# Altium PCB PCB1.PcbDoc
Units mm, origin at the board's own origin, x right, y up, seen from the top; angles counter-clockwise.
Board outline 50 x 50 mm, 2 copper layers (Top Layer, Bottom Layer); 12 components, 11 nets, 39 pads, 0 vias.
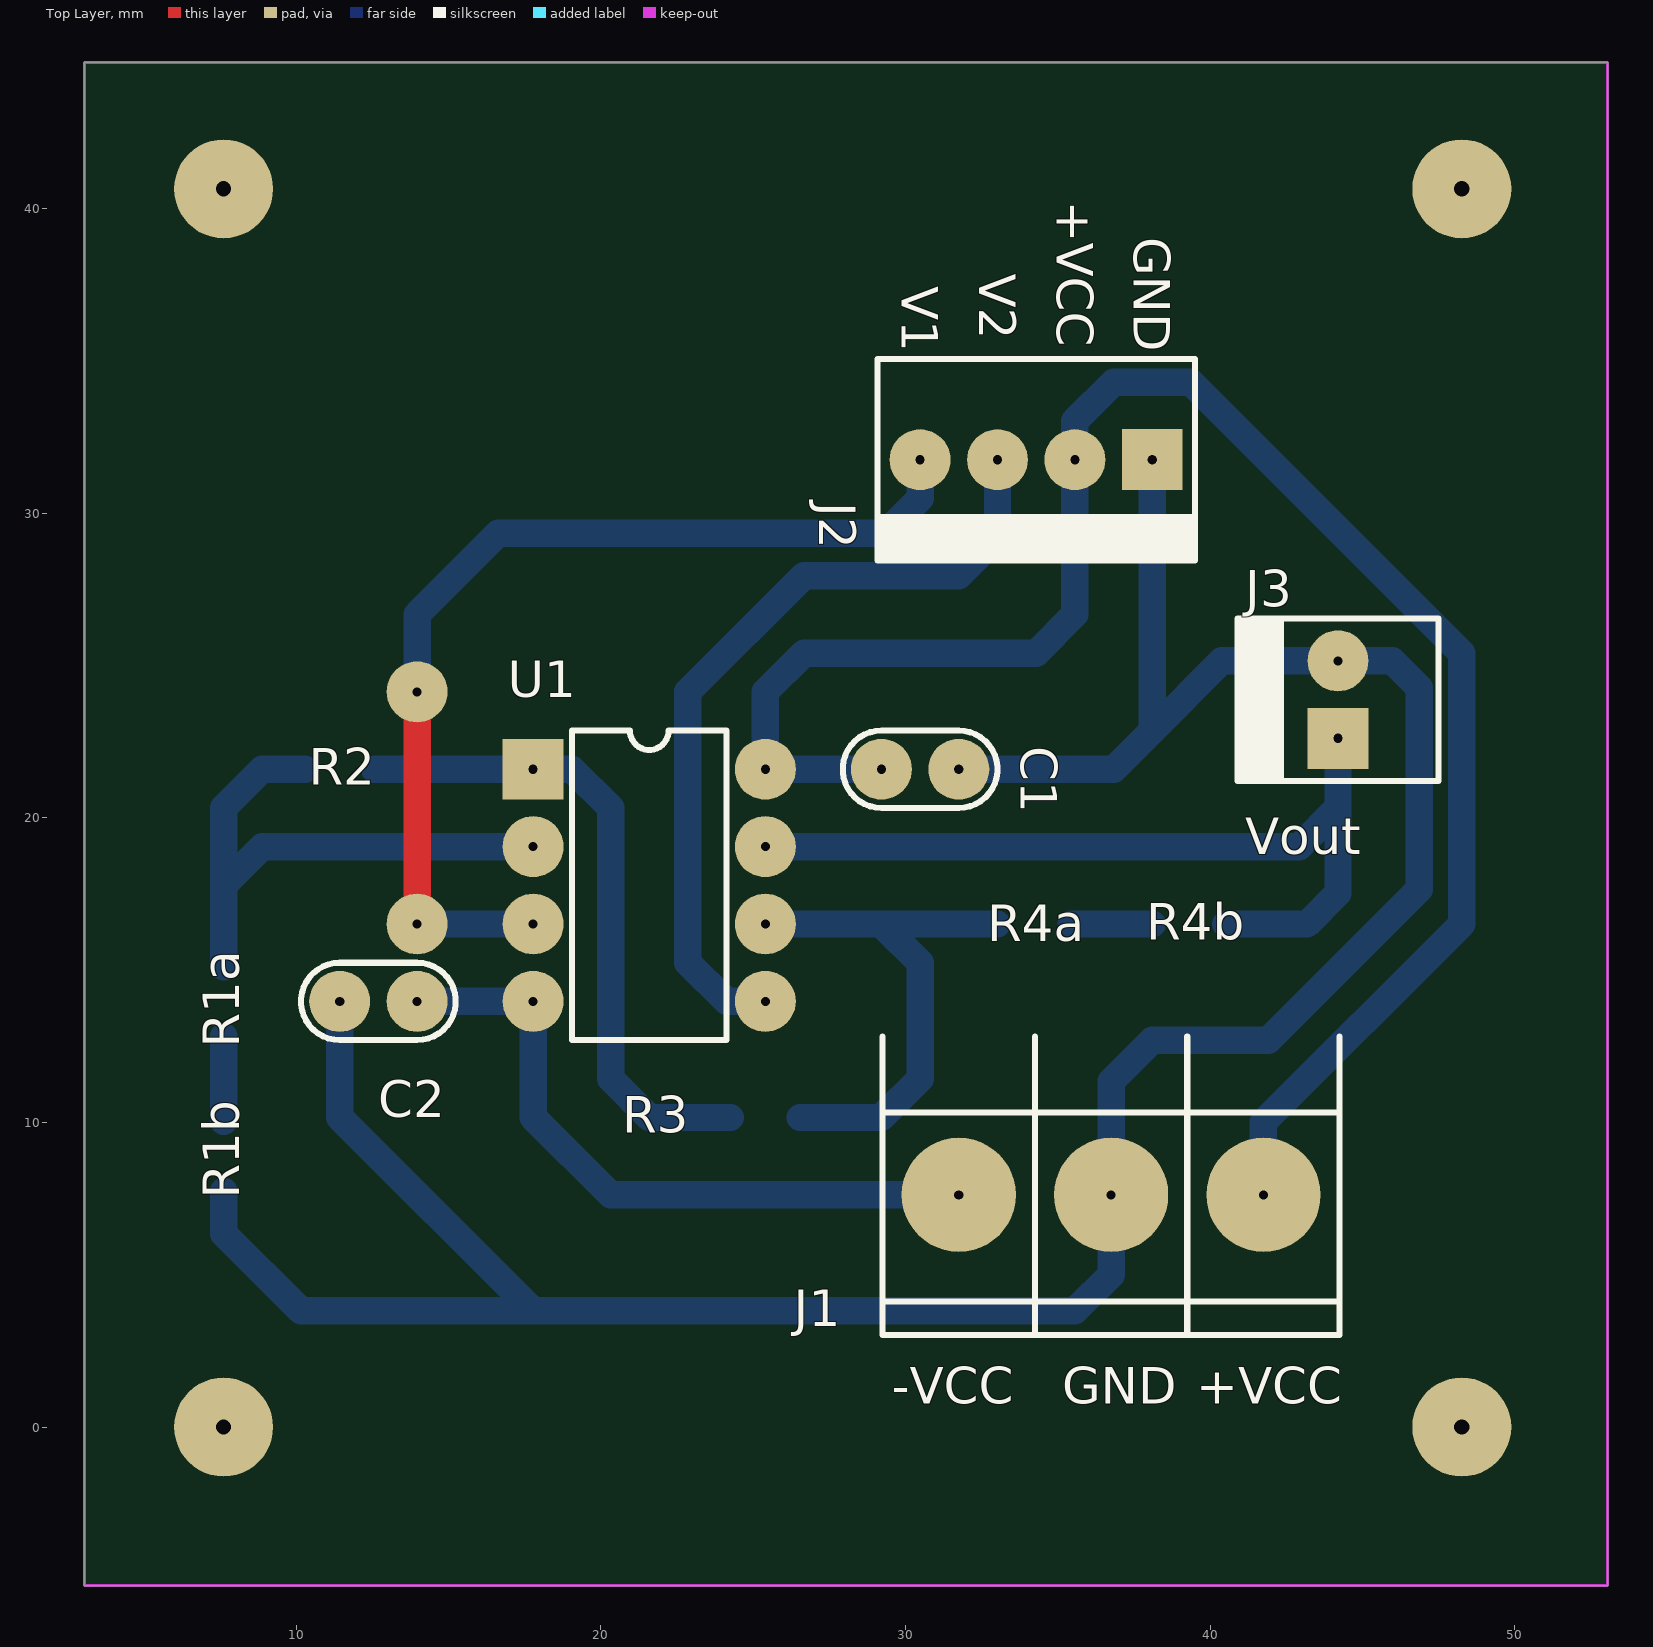
[diagram p0: Top Layer view]
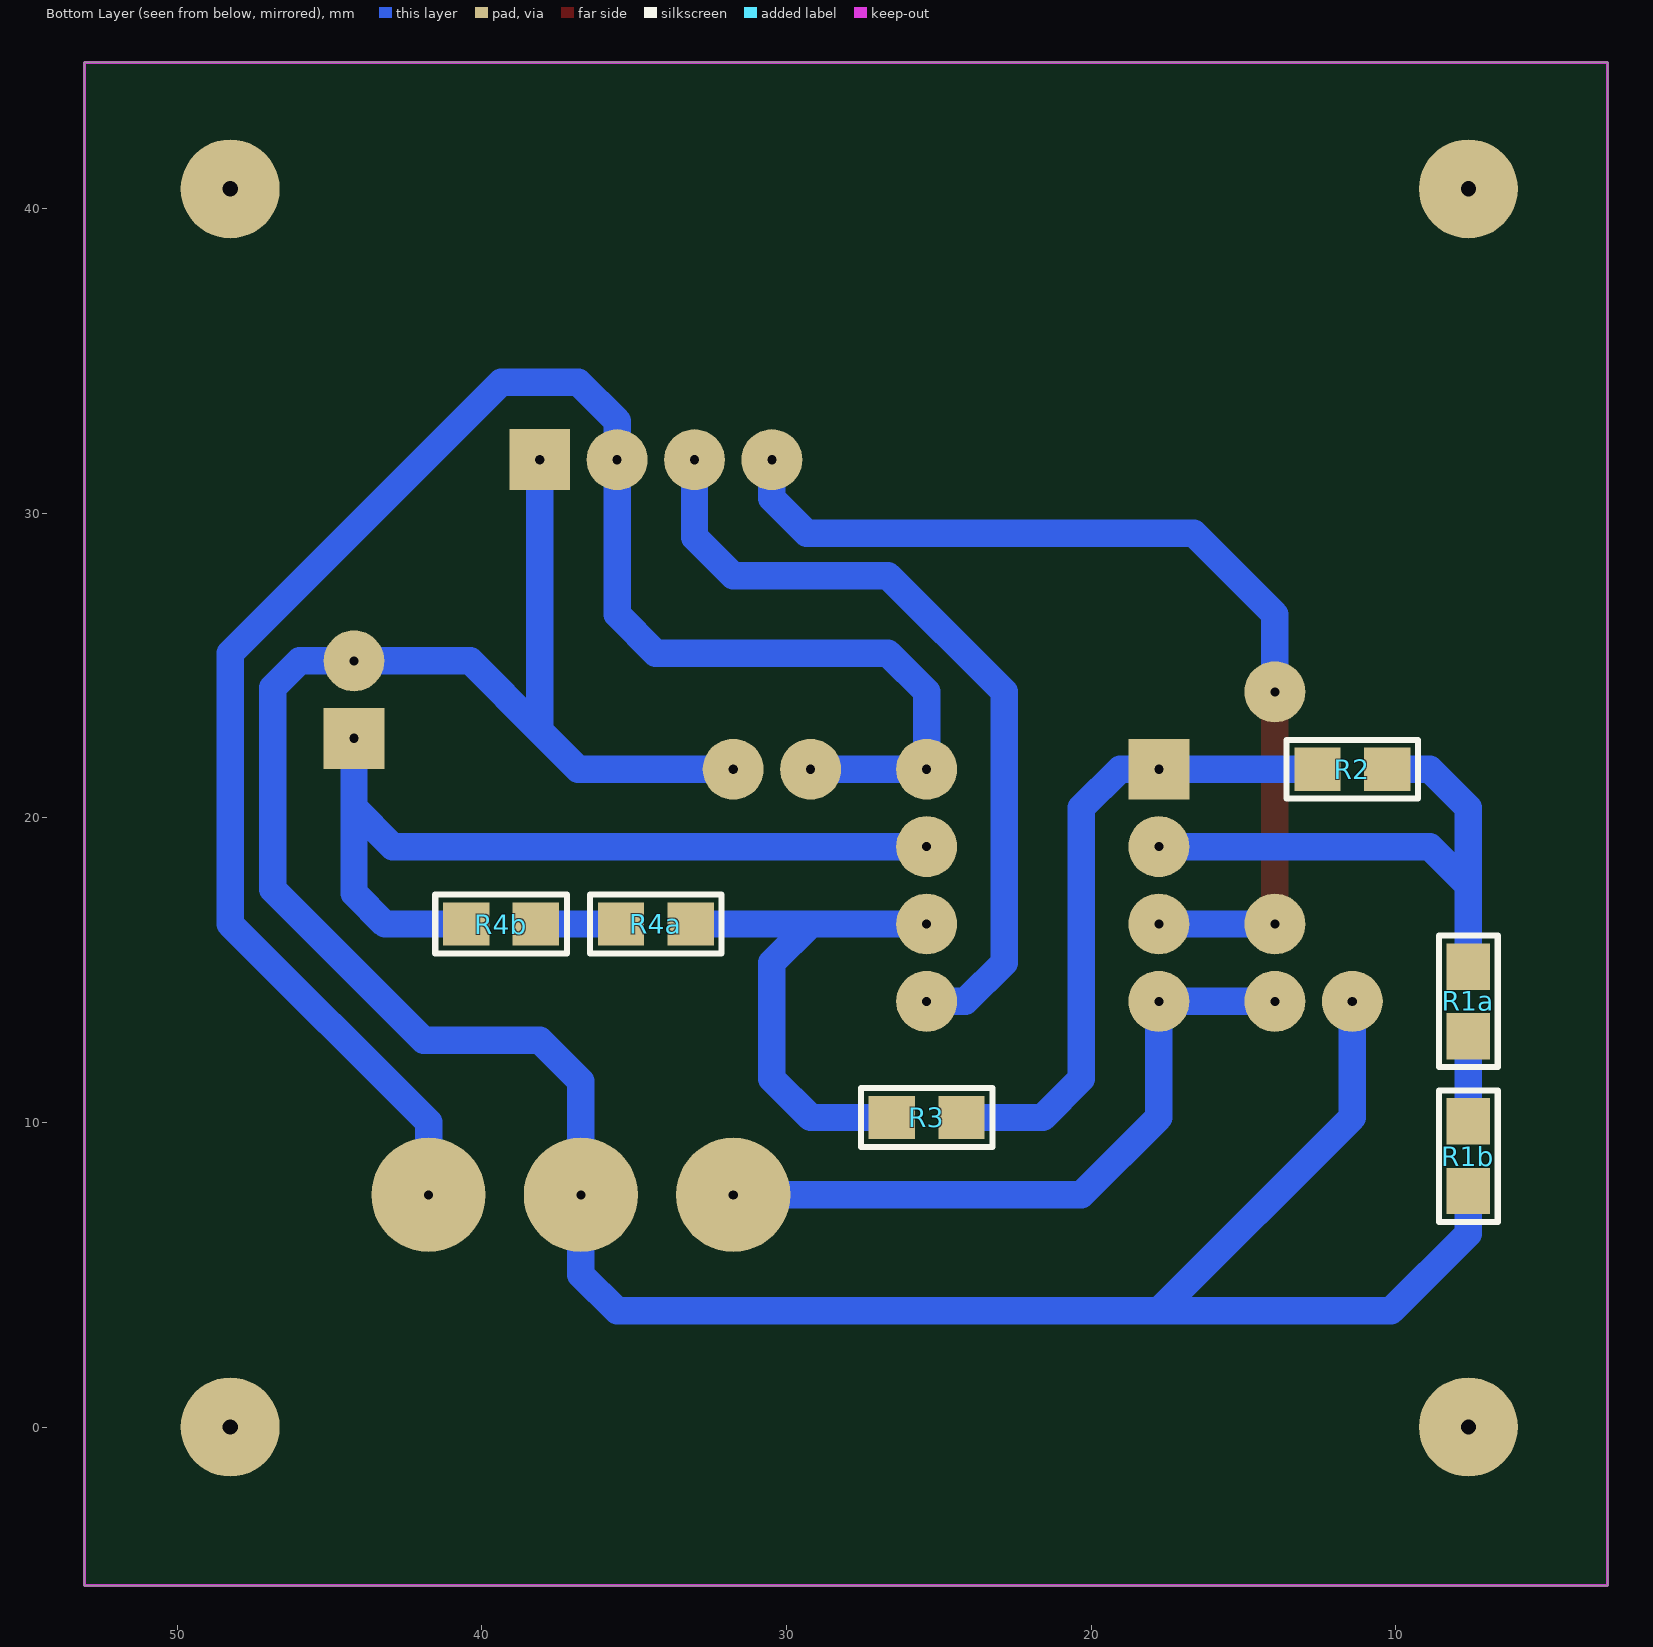
[diagram p1: Bottom Layer view, seen from below]

## Layer stack, top to bottom
Top Solder: solder mask 0.0102, Solder Resist, Dk 3.5
Top Layer: signal copper 0.0356
Dielectric 1: dielectric 0.32, FR-4, Dk 4.8
Bottom Layer: signal copper 0.0356
Bottom Solder: solder mask 0.0102, Solder Resist, Dk 3.5

## Board outline
3.048,-5.207 53.048,-5.207 53.048,44.793 3.048,44.793

## Design rules (kind name [scope] priority, off if disabled: settings)
Clearance [All] p1: gap=0.5 ignorepadtopadclearanceinfootprint=FALSE
PolygonConnect [All] p1: connectstyle=Relief reliefconductorwidth=0.254 reliefentries=4 polygonreliefangle="90 Angle" airgapwidth=0.254
RoutingVias [All] p1: holewidth=0.3 width=2 viastyle="Through Hole" minholewidth=0.3 minwidth=1.5 maxholewidth=0.5 maxwidth=2
SolderMaskExpansion [All] p1: expansion=0.102
Width [All] p1: maxlimit=0.9 minlimit=0.6 preferedwidth=0.9
30 further rules are at their usual default settings.

## Components (designator, comment, footprint, x,y, rotation, side; value= is the part's Value field where it differs from the comment)
C1 "100 nF" CAP100 30.48,21.59 r0 top
C2 "100 nF" CAP100 12.7,13.97 r180 top
J1 "BORNERA 3" BORNERA3 36.75,7.62 r90 top
J2 "MOLEX4" MOLEX4 38.1,31.75 r180 top
J3 "MOLEX2" MOLEX2 44.196,22.606 r90 top
R1a "1.5M" 0805 7.62,13.97 r90 bottom
R1b "22k" 0805 7.62,8.89 r90 bottom
R2 "12k" 0805 11.43,21.59 r0 bottom
R3 "12k" 0805 25.4,10.16 r0 bottom
R4a "1.5M" 0805 34.29,16.51 r0 bottom
R4b "22k" 0805 39.37,16.51 r0 bottom
U1 "TL082" DIP8 17.78,21.59 r0 top

## Footprints (in the part's own frame and the unit in brackets; to place one, negate y for a bottom-side part, rotate by r counter-clockwise, add the part's x,y. Pads: shape width x height; smd on the part's side, far side on the other; paste and mask are expansions set on the pad)
0805 [mil] "Pasivo 0805"
  rect 60x56 smd: 1(-45,0) 2(45,0)
  silkscreen extent -85,-38 85,38, body extent -39,-25 39,25, height 15
BORNERA3 [mm] "Bornera con Tornillos 5mm separación"
  round 3.75 hole 0.3: 1(0,5) 2(0,0) 3(0,-5)
  silkscreen extent -4.6,-7.5 5.2,7.5, body extent -3.76,-7.39 3.94,8.11, height 10.05
CAP100 [mm]
  round 2 hole 0.3: 1(-1.27,0) 2(1.27,0)
  silkscreen extent -2.54,-1.27 2.54,1.27, body extent -2.92,-0.84 2.92,0.86, height 6.12
DIP8 [mm]
  rect 2x2 hole 0.3: 1(0,0)
  round 2 hole 0.3: 2(0,-2.54) 3(0,-5.08) 4(0,-7.62) 5(7.62,-7.62) 6(7.62,-5.08) 7(7.62,-2.54) 8(7.62,0)
  silkscreen extent 1.27,-8.89 6.35,1.27, body extent -0.06,-9.21 7.7,1.59, height 4.5
MOLEX2 [mm]
  rect 2x2 hole 0.3: 1(0,0)
  round 2 hole 0.3: 2(2.54,0)
  silkscreen extent -1.4,-3.3 3.94,3.3, body extent -1.27,-3.17 3.81,3.18, height 10.74
MOLEX4 [mm]
  rect 2x2 hole 0.3: 1(0,0)
  round 2 hole 0.3: 2(2.54,0) 3(5.08,0) 4(7.62,0)
  silkscreen extent -1.4,-3.3 9.02,3.3, body extent -1.27,-3.17 8.89,3.18, height 10.74

## Part data
C1 C2: library part CAP
R1a R1b R2 R3 R4a R4b: library part RES
U1: library part LM833, "Dual Audio Operational Amplifier"

## Free pads (board coordinates)
  round 2 hole 0.3: 3(13.97,24.13) 4(13.97,16.51)
  round 3.25 hole 0.5: 5(7.62,40.64) 6(48.26,40.64) 7(48.26,0) 8(7.62,0)

## Nets (pads, with @x,y where several pads share a name; then routed paths per layer and width w, separated by ;. In a path a pad name is that pad's centre, name@x,y a point inside that pad or via, vN(x,y) a via of type N, cw(c..) or ccw(c..) an arc to the next point about the centre after c; other vN are vias at no path point)
+VCC: C1.1 J1.3 J2.2 U1.8 | length 61.3
  Bottom Layer w0.9: C1.1 U1.8 25.4,24.13 26.67,25.4 34.29,25.4 35.56,26.67 J2.2 35.56,33.02 36.83,34.29 39.37,34.29 48.26,25.4 48.26,16.51 41.75,10 J1.3
-VCC: C2.1 J1.1 U1.4 | length 22.6
  Bottom Layer w0.9: C2.1 U1.4 17.78,10.16 20.32,7.62 J1.1
GND: C1.2 C2.2 J1.2 J2.1 J3.2 R1b.1 | length 96.4
  Bottom Layer w0.9: R1b.1 7.62,6.35 10.16,3.81 17.78,3.81 ; C2.2 11.43,10.16 17.78,3.81 ; C1.2 36.83,21.59 38.1,22.86 ; J2.1 38.1,22.86 ; 17.78,3.81 35.56,3.81 36.75,5 J1.2 36.75,11.35 38.1,12.7 41.91,12.7 46.86,17.65 46.86,24.26 45.974,25.146 J3.2 40.386,25.146 38.1,22.86
NetR1a_1: R1a.1 R1b.2 | length 2.8
  Bottom Layer w0.9: R1b.2 R1a.1
NetR1a_2: R1a.2 R2.1 U1.2 | length 19.1
  Bottom Layer w0.9: R1a.2 7.62,17.78 ; R2.1 8.89,21.59 7.62,20.32 7.62,17.78 ; U1.2 8.89,19.05 7.62,17.78
NetR2_2: R2.2 R3.1 U1.1 | length 21.6
  Bottom Layer w0.9: R2.2 U1.1 19.05,21.59 20.32,20.32 20.32,11.43 21.59,10.16 R3.1
NetR3_2: R3.2 R4a.1 U1.6 | length 17.7
  Bottom Layer w0.9: U1.6 29.21,16.51 ; R3.2 29.21,10.16 30.48,11.43 30.48,15.24 29.21,16.51 ; R4a.1@33.02,16.51 29.21,16.51
NetR4a_2: R4a.2 R4b.1 | length 2.7
  Bottom Layer w0.9: R4a.2 R4b.1@38.1,16.51
V1: J2.4 pad.3 pad.4 U1.3 | length 33.3
  Top Layer w0.9: pad.4 pad.3
  Bottom Layer w0.9: pad.4 U1.3 ; pad.3 13.97,26.67 16.64,29.34 29.34,29.34 30.48,30.48 J2.4
V2: J2.3 U1.5 | length 26.8
  Bottom Layer w0.9: U1.5 24.13,13.97 22.86,15.24 22.86,24.13 26.67,27.94 31.75,27.94 33.02,29.21 J2.3
Vout: J3.1 R4b.2 U1.7 | length 28.5
  Bottom Layer w0.9: U1.7 42.926,19.05 44.196,20.32 ; R4b.2 43.18,16.51 44.196,17.526 44.196,20.32 ; J3.1 44.196,20.32

## Keep-outs
Keep-Out Layer:
  the board outline again, w0.1

## Silkscreen, mask and mechanical layers (free items; w line width, h text height)
Top Overlay:
  text "+VCC" at 34.96,40.245 h1.2 r270
  text "GND" at 37.5,39.046 h1.2 r270
  text "V2" at 32.42,37.846 h1.2 r270
  text "V1" at 29.88,37.446 h1.2 r270
  text "Vout" at 41.148,18.796 h1.2
  text "-VCC" at 29.551,0.762 h1.2
  text "GND" at 35.151,0.762 h1.2
  text "+VCC" at 39.551,0.762 h1.2